# Altium PCB doanTK.PcbDoc
Units mm, origin at the board's own origin, x right, y up, seen from the top; angles counter-clockwise.
Board outline 160.53 x 89.54 mm, 2 copper layers (Top Layer, Bottom Layer); 50 components, 41 nets, 164 pads, 41 vias.
Unrouted connection lines stored in the file: 69.
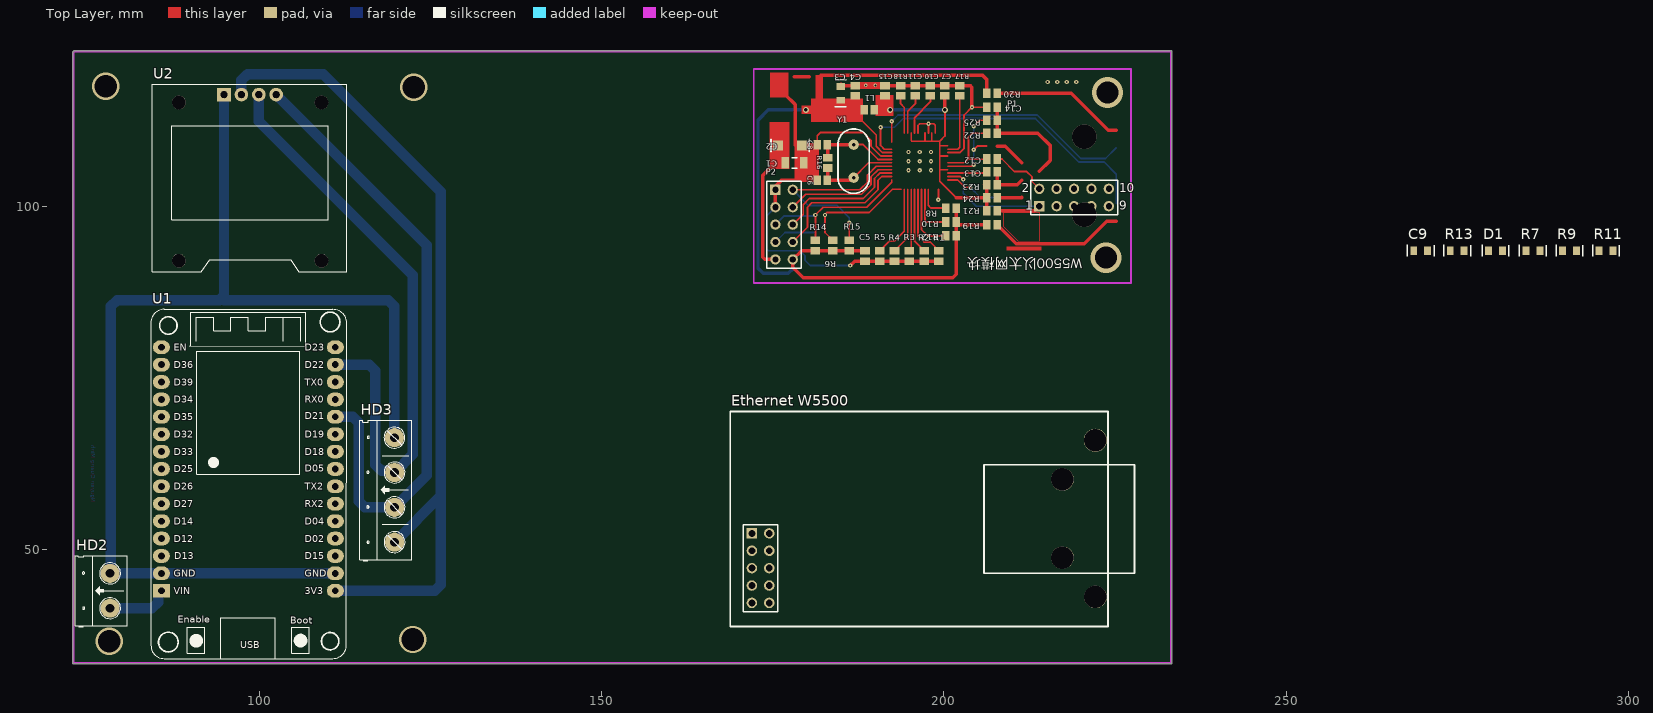
[diagram p0: Top Layer view]
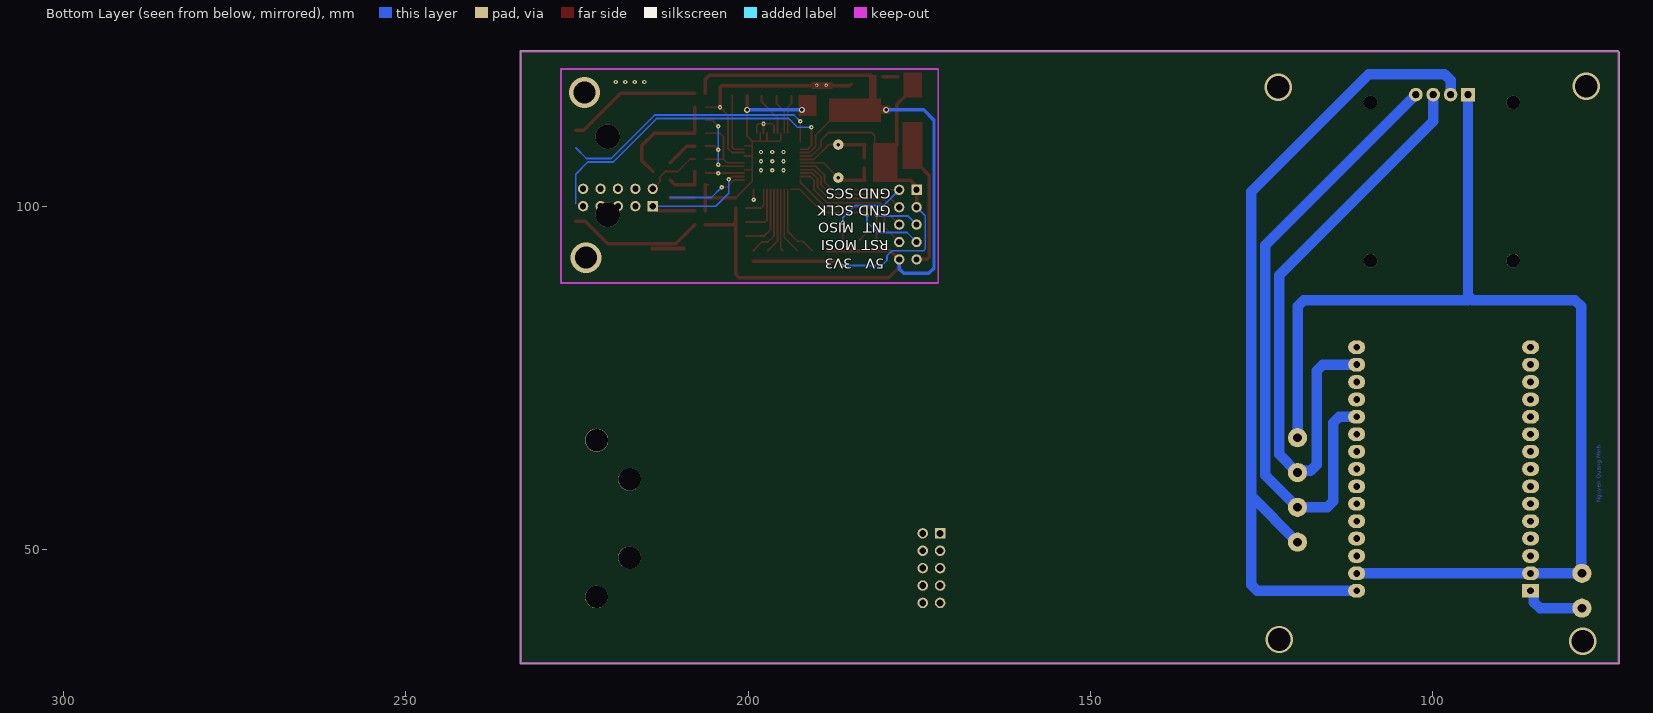
[diagram p1: Bottom Layer view, seen from below]

## Layer stack, top to bottom
Top Solder: solder mask 0.0102, Solder Resist, Dk 3.5
Top Layer: signal copper 0.0356
Dielectric 1: dielectric 0.32, FR-4, Dk 4.8
Bottom Layer: signal copper 0.0356
Bottom Solder: solder mask 0.0102, Solder Resist, Dk 3.5

## Board outline
72.771,33.401 72.771,34.036 72.771,122.555 cw(c72.898,122.555) 72.898,122.682 cw(c73.025,122.682) 73.025,122.809 233.172,122.809 cw(c233.172,122.682) 233.299,122.682 233.299,33.401 cw(c233.172,33.401) 233.172,33.274 72.898,33.274 cw(c72.898,33.401)

## Design rules (kind name [scope] priority, off if disabled: settings)
Clearance [All] p1: gap=0.508 ignorepadtopadclearanceinfootprint=FALSE
PolygonConnect [All] p1: connectstyle=Relief reliefconductorwidth=0.254 reliefentries=4 polygonreliefangle="90 Angle" airgapwidth=0.254
RoomDefinition doantk [InComponentClass('doantk')] p1: confinementstyle=ConfineIn formatcopy=TRUE lockcomponents=FALSE outline 244.983,26.797 258.699,26.797 258.699,41.021 244.983,41.021
RoutingLayers [All] p1: top layer_v5=FALSE bottom layer_v5=TRUE
RoutingVias [All] p1: holewidth=0.711 width=1.27 viastyle="Through Hole" minholewidth=0.711 minwidth=1.27 maxholewidth=0.711 maxwidth=1.27
SolderMaskExpansion [All] p1: expansion=0.102 istentingtop=FALSE
Width [All] p1: maxlimit=2.032 minlimit=0.762 preferedwidth=1.524
29 further rules are at their usual default settings.

## Components (designator, comment, footprint, x,y, rotation, side; value= is the part's Value field where it differs from the comment)
C1 "tanCap" C1206#1 178.181,106.426 r0 top value=10uF
C2 "tanCap" C1206#2 177.546,108.966 r0 top value=10uF
C3 "Cap" C0805#1 184.912,116.586 r90 top value=0.1uF
C4 "Cap" C0805#2 187.071,116.967 r90 top value=0.1uF
C5 "Cap" C0805#2 188.468,92.837 r270 top value=0.1uF
C6 "Cap" C0805#2 182.245,103.886 r0 top value=0.1uF
C7 "Cap" C0805#2 200.12,116.967 r90 top value=0.1uF
C8 "Cap" C0805#2 182.245,109.093 r0 top value=6.8nF
C9 "Cap" C0805#1 269.621,93.599 r0 top value=22nF
C10 "Cap" C0805#2 198.025,116.967 r90 top value=0.01uF
C11 "Cap" C0805#2 195.834,116.967 r90 top value=6.8nF
C12 "Cap" C0805#2 207.01,106.988 r180 top value=18pF
C13 "Cap" C0805#2 207.01,105.102 r0 top value=4.7uF
C14 "Cap" C0805#2 207.01,114.554 r0 top value=0.01uF
C15 "Cap" C0805#2 191.389,116.967 r270 top value=18pF
D1 "POWER" C0805#1 280.543,93.599 r0 top
"Ethernet W5500" "Ethernet W5500" "Ethernet W5500" 197.612,54.864 r0 top
HD2 "Pin" HED2 78.232,41.402 r90 top value="Header 2"
HD3 "Max30102" HED4 119.771,51.044 r90 top value="Header 4"
L1 "Inductor" C0805#2 189.103,114.173 r0 top value=1uH
P1 "排针引出" HDR2X5 213.921,100.101 r0 top
P2 "HR911105A" HDR2X5 175.387,102.489 r270 top
R1 "Res2" C0805#2 199.263,92.837 r270 top value=10K
R2 "Res2" C0805#2 197.104,92.837 r270 top value=10K
R3 "Res2" C0805#2 194.945,92.837 r270 top value=10K
R4 "Res2" C0805#2 192.786,92.837 r270 top value=10K
R5 "Res2" C0805#2 190.627,92.837 r270 top value=10K
R6 "Res2" C0805#2 183.769,94.361 r270 top value=10K
R7 "Res2" C0805#1 286.004,93.599 r0 top value=10K
R8 "Res2" C0805#2 201.041,99.822 r0 top value=10K
R9 "Res2" C0805#1 291.338,93.599 r0 top value=10K
R10 "Res2" C0805#2 201.041,97.79 r0 top value=10K
R11 "Res2" C0805#1 296.672,93.599 r0 top value=10K
R12 "Res2" C0805#2 201.041,95.758 r0 top value=10K
R13 "Res2" C0805#1 274.955,93.599 r0 top value=1K
R14 "Res2" C0805#2 181.229,94.361 r270 top value=10K
R15 "Res2" C0805#2 186.182,94.361 r270 top value=10K
R16 "Res2" C0805#2 183.007,106.426 r270 top value=51R
R17 "Res2" C0805#2 202.311,116.967 r270 top value=51R
R18 "Res2" C0805#2 193.675,116.967 r270 top value=10R
R19 "Res2" C0805#2 207.01,97.409 r0 top value="12.4K 1%"
R20 "Res2" C0805#2 207.01,116.586 r0 top value=82R
R21 "Res2" C0805#2 207.01,99.441 r180 top value=82R
R22 "Res2" C0805#2 207.01,110.762 r180 top value=1K
R23 "Res2" C0805#2 207.01,103.215 r180 top value=10K
R24 "Res2" C0805#2 207.01,101.328 r180 top value=1K
R25 "Res2" C0805#2 207.01,112.649 r0 top value=1M
U1 "ESP32_30" ESP32_30 98.425,61.722 r0 top
U2 "DISPLAY_OLED" DISPLAY_OLED 98.679,104.267 r0 top
Y1 "25MHz" XTAL-HC49 186.817,109.093 r270 top

## Footprints (in the part's own frame and the unit in brackets; to place one, negate y for a bottom-side part, rotate by r counter-clockwise, add the part's x,y. Pads: shape width x height; smd on the part's side, far side on the other; paste and mask are expansions set on the pad)
C0805#1 [mm] "Chip Resistor; Body 2.0 x 1.3 mm (LxW typ)"
  rect 1x1.27 smd: 1(-1.016,0) 2(1.016,0)
  silkscreen extent -1.96,-0.84 1.96,0.84, body extent -1,-0.62 1,0.63, height 0.78
C0805#2 [mm] "Chip Capacitor, Body 2.0x1.3mm, IPC High Density"
  rect 1.1x1.4 smd: 1(-0.75,0) 2(0.75,0)
  body extent -1.1,-0.72 1.1,0.72, height 1.4
C1206#1 [mm] "Chip Capacitor, Body 3.2x1.6mm, IPC High Density"
  rect 1.1x1.7 smd: 1(-1.35,0) 2(1.35,0)
  silkscreen extent -0.4,-0.75 0.4,0.75, body extent -1.7,-0.9 1.7,0.9, height 1.3
C1206#2 [mm]
  rect 1.524x1.524 smd: 1(-1.778,0) 2(1.778,0)
  silkscreen extent -2.79,-0.89 2.79,0.89, body extent -1.6,-0.89 1.6,0.89, height 1.02
DISPLAY_OLED [mm]
  rect 2x2 hole 1: 1(-3.81,12.128)
  round 2 hole 1: 2(-1.27,12.128) 3(1.27,12.128) 4(3.81,12.128)
  round 2 hole 2 unplated: ""(-10.414,-12.128) ""(-10.414,10.986) ""(10.414,-12.128) ""(10.414,10.986)
  silkscreen extent -14.3,-13.78 14.15,13.66, body extent -14.28,-13.76 14.12,13.64, height 5.7
ESP32_30 [mm] "Microcontoller Board 30 Pins Wifi 2.4GHz BLE 4.2 ESP32-WROOM-32D"
  oval 2.5x2 hole 1: 1(-12.7,17.78) 2(-12.7,15.24) 3(-12.7,12.7) 4(-12.7,10.16) 5(-12.7,7.62) 6(-12.7,5.08) 7(-12.7,2.54) 8(-12.7,0) 9(-12.7,-2.54) 10(-12.7,-5.08) 11(-12.7,-7.62) 12(-12.7,-10.16) 13(-12.7,-12.7) 14(-12.7,-15.24) 16(12.7,17.78) 17(12.7,15.24) 18(12.7,12.7) 19(12.7,10.16) 20(12.7,7.62) 21(12.7,5.08) 22(12.7,2.54) 23(12.7,0) 24(12.7,-2.54) 25(12.7,-5.08) 26(12.7,-7.62) 27(12.7,-10.16) 28(12.7,-12.7) 29(12.7,-15.24) 30(12.7,-17.78)
  rect 2.5x2 hole 1: 15(-12.7,-17.78)
  silkscreen extent -14.23,-27.69 14.35,23.31, body extent -14.15,-27.61 14.35,23.29, height 7
"Ethernet W5500" [mm]
  rect 1.53x1.53 hole 1: 1(-25.654,-2.54)
  round 1.53 hole 1: 2(-25.654,-5.08) 3(-25.654,-7.62) 4(-25.654,-10.16) 5(-25.654,-12.7) 6(-23.114,-12.7) 7(-23.114,-10.16) 8(-23.114,-7.62) 9(-23.114,-5.08) 10(-23.114,-2.54)
  round 3.4 hole 3.3: 3(24.511,11.049)
  round 3.3 hole 3.3: 4(19.685,-6.096) 4(19.685,5.334) 4(24.511,-11.811)
  silkscreen extent -28.83,-16.13 30.23,15.24, body extent -28.32,-14.33 30.58,13.57, height 15.56
HDR2X5 [mm] "Connector; Header; 5x2 Position"
  rect 1.5x1.5 hole 0.9: 1(0,0)
  round 1.5 hole 0.9: 2(0,2.54) 3(2.54,0) 4(2.54,2.54) 5(5.08,0) 6(5.08,2.54) 7(7.62,0) 8(7.62,2.54) 9(10.16,0) 10(10.16,2.54)
  silkscreen extent -1.27,-1.27 11.43,3.81
HED2 [mil] "Header 2, 2 pin, hight 300mil, Pin to Pin 200, Colour Green"
  round 110 hole 50: 1(0,0) 2(200,0)
  silkscreen extent -106,-100 300,200, body extent -92,-140 302,155, height 394
HED4 [mil] "Header 4, 4 pin, hight 300mil, Pin to Pin 200, Colour Green"
  round 110 hole 50: 1(0,0) 2(200,0) 3(400.06,0.06) 4(600.39,0.39)
  silkscreen extent -106,-100 700,200
XTAL-HC49 [mil]
  round 60 hole 19.68: 1(0,0) 2(190,0)
  silkscreen extent -90,-90 280,90

## Part data
C1 C2: library part "Cap Pol2", "Polarized Capacitor (Axial)", LatestRevisionDate=17-Jul-2002, LatestRevisionNote="Re-released for DXP Platform.", PackageDescription="Polarized Capacitor; 2 Leads", PackageReference=POLAR0.8, Published=8-Jun-2000, Publisher="Altium Limited"
C3 C4 C5 C6 C7 C8 C9 C10 C11 C12 C13 C14 C15: "Capacitor", LatestRevisionDate=17-Jul-2002, LatestRevisionNote="Re-released for DXP Platform.", PackageDescription="Radial Cap, Thru-Hole; 2 Leads; 0.3 in Pin Spacing", PackageReference=RAD-0.3, Published=8-Jun-2000, Publisher="Altium Limited"
D1: library part LED0, "Typical INFRARED GaAs LED", LatestRevisionDate=08-Jul-2005, LatestRevisionNote="Mech Layer 1 removed.", PackageDescription="LED; 2 Leads", PackageReference=LED-0, Published=8-Jun-2000, Publisher="Altium Limited"
HD2: library part Hed2, "Header 2 (Green)"
HD3: library part Hed4, "Header 4 (Green)"
P1: library part "Header 5X2", "Header, 5-Pin, Dual row", LatestRevisionDate=17-Jul-2002, LatestRevisionNote="Re-released for DXP Platform.", Publisher="Altium Limited"
P2: "RJ45插座"
R1 R2 R3 R4 R5 R6 R7 R8 R9 R10 R11 R12 R13 R14 R15 R16 R17 R18 R19 R20 R21 R22 R23 R24 R25: "Resistor", LatestRevisionDate=17-Jul-2002, LatestRevisionNote="Re-released for DXP Platform.", PackageDescription="Axial Device, Thru-Hole; 2 Leads; 0.4 in Pin Spacing", PackageReference=AXIAL-0.4, Published=8-Jun-2000, Publisher="Altium Limited"
U1: "Microcontoller Board 30 Pins Wifi 2.4GHz BLE 4.2 ESP32-WROOM-32D", ComponentLink1Description=Datasheet, ComponentLink1URL=https://www.mouser.com/datasheet/2/891/esp32_wroom_32d_esp32_wroom_32u_datasheet_en-1365844.pdf
U2: "Display Oled 128x64 0.96\" I2C."
Y1: library part XTAL, "Crystal Oscillator", LatestRevisionDate=17-Jul-2002, LatestRevisionNote="Re-released for DXP Platform.", PackageDescription="Crystal, Thru-Hole; 2 Leads; Body 3.1 x 8.2 mm (Dia.xH)", PackageReference=R38, Published=8-Jun-2000, Publisher="Altium Limited"
L1: Code_IEC=1005, Code_JEITA=0402, LatestRevisionDate=29-May-2009, LatestRevisionNote="IPC-7351 Footprint Added.", PackageDescription="Chip Inductor", PackageReference=0402-A, Published=8-Jun-2000, Publisher="Altium Limited"

## Via types
v1: diameter 0.635, hole 0.254, Top Layer to Bottom Layer, 28 vias
v2: diameter 4, hole 3.3, Top Layer to Bottom Layer, 4 vias
v3: diameter 0.889, hole 0.508, Top Layer to Bottom Layer, 3 vias
v4: diameter 4.5, hole 3.2, Top Layer to Bottom Layer, 2 vias
v5: diameter 3.581, hole 3.581, Top Layer to Bottom Layer, 2 vias
v6: diameter 0.508, hole 0.254, Top Layer to Bottom Layer, 2 vias

## Nets (pads, with @x,y where several pads share a name; then routed paths per layer and width w, separated by ;. In a path a pad name is that pad's centre, name@x,y a point inside that pad or via, vN(x,y) a via of type N, cw(c..) or ccw(c..) an arc to the next point about the centre after c; other vN are vias at no path point)
3V3: HD3.1 U1.30 U2.2 | length 121.4
  Bottom Layer w1.524: U2.2 97.409,118.487 98.302,119.38 109.347,119.38 126.517,102.21 126.517,57.79 ; U1.30 125.625,43.942 126.517,44.835 126.517,57.79 ; HD3.1 126.517,57.79
5V: HD2.1 U1.15 | length 9.4
  Bottom Layer w1.524: HD2.1 84.344,41.402 85.237,42.295 85.237,43.704 85.475,43.942 U1.15
/INT: P1.5 R14.1
/RESET: P1.7 R12.1 | length 9.9
  Top Layer w0.254: 196.719,102.58 196.719,96.651 197.612,95.758 R12.1
/SPI-SCS: P1.2 R15.1 U1.4
ACTLED: P2.10
GND: C1.2 C2.2 C3.2 C4.2 C5.2 C6.1 C7.2 C9.2 C10.1 C12.1 C13.2 C14.2 C15.1 D1.2 HD2.2 HD3.4 P1.1 P1.3 R1.1 R3.1 R5.1 R7.2 R8.2 R9.2 R10.2 R11.2 R19.1 R23.1 U1.14 U1.29 U2.1 | length 206.4
  Top Layer w0.254: R5.1 192.036,94.996 192.786,94.996 194.219,96.429 194.219,102.58 ; R3.1 195.219,93.861 195.219,102.58 ; 195.719,110.78 195.719,113.042 198.025,115.348 C10.1 C10.1@198.005,116.197 ; 196.219,102.58 196.219,95.754 197.104,94.869 197.981,94.869 R1.1
  Top Layer w0.508: C13.2 R23.1 207.796,103.251 210.721,103.251 211.381,103.911
  Bottom Layer w1.524: 94.524,86.705 94.869,86.36 118.868,86.36 119.761,85.467 HD3.4 ; U2.1 94.869,87.05 94.179,86.36 79.252,86.36 78.359,85.467 78.359,46.609 HD2.2 U1.14 U1.29
LINKLED: 
NetC13_1: C13.1 | length 5.8
  Top Layer w0.254: 200.569,104.93 206.088,104.93 C13.1
  other v1: 204.343,104.902
NetD1_1: D1.1 R13.1
NetP2_9: P2.9 R22.2
NetP2_12: R24.2
NetR7_1: R7.1
NetR8_1: R8.1 | length 5.1
  Top Layer w0.254: 197.719,102.58 197.719,100.223 198.12,99.822 R8.1
NetR9_1: R9.1
NetR10_1: R10.1 | length 7.7
  Top Layer w0.254: 197.219,102.58 197.219,98.056 197.485,97.79 R10.1
NetR11_1: R11.1
NetR19_2: R19.2 | length 19.9
  Top Layer w0.508: R19.2 210.554,94.615 220.472,94.615 223.783,97.926 225.171,97.926
NetR23_2: R23.2
PMODE0: R1.2 R2.1 | length 9.6
  Top Layer w0.254: 195.719,102.58 195.719,94.972 R2.1
PMODE1: R3.2 R4.1 | length 9.8
  Top Layer w0.254: R4.1 194.719,95.52 194.719,102.58
PMODE2: R5.2 R6.1
RCT: C10.2 P2.5 R20.1 R21.2
RXN: C11.2 R21.1
RXNNET: C11.1 P2.6 | length 25
  Top Layer w0.254: P2.6 179.451,98.933 179.451,100.33 180.34,101.219 188.214,101.219 189.865,102.87 189.865,104.14 190.655,104.93 192.369,104.93 ; 194.719,110.78 194.719,113.947 195.834,115.062 C11.1
RXP: C8.2 R20.2 | length 19.7
  Top Layer w0.508: R20.2 218.567,116.586 223.977,111.176 225.171,111.176
RXPNET: C8.1 P2.3
SCL: HD3.3 U1.17 U2.3 | length 88.8
  Bottom Layer w1.524: U2.3 99.949,112.522 122.428,90.043 122.428,63.864 HD3.3 119.526,61.449 117.868,61.449 116.967,62.349 116.967,76.069 116.074,76.962 U1.17
SDA: HD3.2 U1.20 U2.4 | length 92.1
  Bottom Layer w1.524: U2.4 124.46,94.424 124.46,60.813 HD3.2 115.447,56.124 114.554,57.017 114.554,68.449 113.661,69.342 U1.20
SPI-MISO: P1.6
SPI-MOSI: P1.8
SPI-SCLK: P1.4
TCT: C9.1 P2.4 R18.2 | length 23
  Top Layer w0.254: P2.4 179.832,101.854 187.96,101.854 189.357,103.251 189.357,104.394 190.393,105.43 192.369,105.43 ; R18.2 193.675,115.062 194.219,114.518 194.219,110.78
TXN: P2.2 R17.2 | length 9.4
  Top Layer w0.254: 200.569,108.43 202.029,108.43 202.311,108.712 R17.2
TXP: P2.1 R16.2
VCC-1V2: C14.1
VCC-3V3A: C6.2 C7.1 L1.2 R16.1 R17.1 R18.1
VCC-3V3D: C2.1 C4.1 C5.1 L1.1 P1.10 R2.2 R4.2 R6.2 R12.2 R13.2 R14.2 R15.2 R22.1 R24.1 | length 3.6
  Top Layer w0.508: R24.1 211.337,101.328 211.381,101.371
VCC-5V: C1.1 C3.1 P1.9
XI: C15.2 R25.1 Y1.1 | length 13.9
  Top Layer w0.254: 200.569,105.93 204.101,105.93 v1(204.343,106.172) ; v1(204.343,108.331) 204.887,108.875 206.26,108.875 ; v1(204.343,111.76) 205.232,112.649 R25.1
  Bottom Layer w0.254: v1(204.343,106.172) v1(204.343,108.331) v1(204.343,111.76)
XO: C12.2 R25.2 Y1.2
pads on no net: "Ethernet W5500.1" "Ethernet W5500.2" "Ethernet W5500.3" "Ethernet W5500.4" "Ethernet W5500.5" "Ethernet W5500.6" "Ethernet W5500.7" "Ethernet W5500.8" "Ethernet W5500.9" "Ethernet W5500.10" P2.7 P2.8 U1.1 U1.2 U1.3 U1.5 U1.6 U1.7 U1.8 U1.9 U1.10 U1.11 U1.12 U1.13 U1.16 U1.18 U1.19 U1.21 U1.22 U1.23 U1.24 U1.25 U1.26 U1.27 U1.28 U2.
copper on no net: | length 577.9
  Top Layer w0.254: 177.927,94.869 180.086,97.028 180.086,99.949 180.721,100.584 188.468,100.584 190.373,102.489 190.373,103.886 190.917,104.43 192.369,104.43 ; 177.927,102.489 187.706,102.489 188.849,103.632 188.849,104.648 190.131,105.93 192.369,105.93 ; 181.229,95.111 v1(181.229,98.806) 182.372,99.949 188.722,99.949 192.369,103.596 192.369,103.93 ; 181.495,109.093 181.495,110.375 181.991,110.871 188.214,110.871 189.357,109.728 189.357,108.839 190.766,107.43 192.369,107.43 ; 183.769,95.111 182.626,96.254 v1(182.626,98.806) 182.499,98.806 182.88,99.187 189.103,99.187 192.496,102.58 193.719,102.58 ; 186.182,95.111 v1(186.182,97.663) ; 186.817,104.267 188.98,106.43 192.369,106.43 ; 186.817,109.093 188.214,109.093 190.377,106.93 192.369,106.93 ; 187.452,113.157 190.119,110.49 190.119,108.839 191.028,107.93 192.369,107.93 ; v1(190.754,111.633) 190.754,108.966 191.29,108.43 192.369,108.43 ; 192.369,109.43 v1(192.369,112.486) ; 195.219,110.78 195.219,109.708 195.326,109.601 197.231,109.601 ; 196.219,110.78 196.219,111.891 196.469,112.141 v1(197.739,112.141) ; 197.219,110.78 197.219,109.613 197.231,109.601 ; 197.719,110.78 197.739,110.8 v1(197.739,112.141) ; 198.219,110.78 198.219,109.7 198.12,109.601 ; 198.719,110.78 198.719,111.923 198.501,112.141 v1(197.739,112.141) ; v1(199.189,101.039) 199.219,101.068 199.219,102.58 ; 199.497,105.43 200.569,105.43 ; v3(200.152,114.173) 200.152,110.363 199.39,109.601 ; 200.569,103.93 202.013,103.93 203.073,102.87 v1(203.835,102.87) ; 200.569,104.43 202.402,104.43 v1(202.819,104.013) ; 200.569,106.43 203.069,106.43 203.581,106.942 ; 200.569,107.43 199.402,107.43 199.39,107.442 ; 200.569,107.93 202.291,107.93 202.946,108.585 202.946,113.411 v1(204.089,114.554) 206.26,114.554 ; 200.569,108.93 199.481,108.93 199.39,108.839 ; 201.821,101.328 199.39,103.759 199.39,105.537 199.39,107.442 ; 205.776,103.215 206.26,103.215 ; 206.26,106.988 206.213,106.942 203.581,106.942 ; 206.26,110.762 204.107,110.762 203.581,110.236 203.581,106.942 ; 207.76,106.988 208.48,106.988 210.312,105.156 212.09,105.156 212.852,104.394 212.852,103.71 213.921,102.641 ; 197.231,109.601 198.12,109.601 ; 198.12,109.601 199.39,109.601 ; 199.39,107.442 199.39,108.839 ; 199.39,108.839 199.39,109.601
  Top Layer w0.508: 174.879,105.918 173.546,104.584 173.546,92.647 173.863,92.329 175.387,92.329 ; 175.387,99.949 175.387,102.489 175.387,102.997 176.276,103.886 179.07,103.886 ; 175.993,116.473 176.77,116.473 178.296,114.947 178.296,108.966 ; 178.169,118.999 180.352,118.999 ; 181.852,118.999 182.106,119.253 205.613,119.253 206.26,118.606 206.26,116.586 ; 183.007,105.676 183.007,103.898 182.995,103.886 186.436,103.886 186.817,104.267 ; 183.007,107.176 183.007,109.081 182.995,109.093 186.817,109.093 ; 184.912,117.936 185.131,117.717 187.071,117.717 191.389,117.717 193.675,117.717 202.311,117.717 203.847,117.717 204.089,117.475 v1(204.089,114.554) ; v1(186.309,91.44) 186.956,92.087 188.468,92.087 190.627,92.087 192.786,92.087 194.945,92.087 197.104,92.087 199.263,92.087 ; 188.468,93.587 188.444,93.611 186.182,93.611 183.769,93.611 181.229,93.611 179.209,93.611 177.927,92.329 177.927,91.186 179.451,89.662 201.295,89.662 201.791,90.158 201.791,95.758 201.791,97.79 ; 200.12,116.217 200.12,114.205 v3(200.152,114.173) ; 201.791,99.822 201.791,97.79 ; 201.821,101.328 206.26,101.328 ; 206.26,97.409 202.172,97.409 201.791,97.79 ; 206.26,99.441 206.26,101.328 ; 206.26,103.215 206.26,101.328 ; 207.76,99.441 209.296,99.441 213.261,99.441 213.921,100.101 ; 207.76,108.875 208.957,108.875 211.381,106.451 ; 207.76,114.554 207.76,112.649 207.76,110.762 213.723,110.762 215.519,108.966 215.519,106.779 213.921,105.181
  Bottom Layer w0.254: 175.387,94.869 176.784,96.266 181.102,96.266 182.626,97.79 v1(182.626,98.806) ; 175.387,97.409 176.657,98.679 181.102,98.679 v1(181.229,98.806) ; 175.387,99.949 174.117,98.679 174.117,93.853 174.371,93.599 178.943,93.599 179.705,92.837 179.705,92.202 180.467,91.44 v1(186.309,91.44) ; 177.927,102.489 180.213,100.203 184.404,100.203 186.182,98.425 v1(186.182,97.663) ; v1(190.754,111.633) 192.786,111.633 194.056,112.903 213.36,112.903 219.71,106.553 223.393,106.553 225.171,104.775 225.171,100.457 ; v1(192.369,112.486) 193.294,113.411 213.614,113.411 219.964,107.061 223.6,107.061 225.171,108.632 ; v1(202.819,104.013) 202.819,101.981 204.699,100.101 213.921,100.101 ; v1(203.835,102.87) 205.334,101.371 211.381,101.371
  Bottom Layer w0.508: 177.927,92.329 177.927,90.932 177.292,90.297 173.609,90.297 172.847,91.059 172.847,112.649 174.371,114.173 v3(179.832,114.173) ; v3(192.151,114.173) v3(200.152,114.173)
  other v1: 194.818,105.346 196.469,105.346 198.12,105.346 194.818,106.68 196.469,106.68 198.12,106.68 194.818,108.013 196.469,108.013 198.12,108.013 215.138,118.237 216.535,118.237 217.932,118.237 219.329,118.237
  other v2: 78.105,36.576 122.428,36.83 122.555,117.475 77.597,117.602
  other v4: 223.647,92.583 223.901,116.713
  other v5: 220.525,98.831 220.525,110.261
  other v6: 188.595,117.729 189.992,117.729

## Polygon pours and split planes (outlines as drawn)
no net on Top Layer "Top Layer-GND" (solid, pour order 3): 213.995,95.029 213.995,99.162 208.686,99.162 208.661,99.187 208.661,97.155 210.82,94.996

## Keep-outs
Keep-Out Layer:
  lines w0.254: 72.898,122.555 72.898,34.036 72.898,33.401 233.172,33.401 233.172,122.682 73.025,122.682 ; 172.212,88.9 172.212,120.142 227.33,120.142 227.33,88.9 213.55,88.9 185.992,88.9 172.212,88.9

## Other copper
Top Layer:
  region: 177.419,112.395 174.498,112.395 174.498,105.537 177.419,105.537
  region: 180.594,114.808 179.197,114.808 179.197,113.538 180.594,113.538
  region: 188.214,115.824 180.594,115.824 180.594,112.395 188.214,112.395
  region: 192.659,116.332 189.992,116.332 189.992,113.284 192.659,113.284
  region: 177.292,119.634 174.625,119.634 174.625,115.951 177.292,115.951
  region: 182.372,119.253 181.229,119.253 181.229,115.57 182.372,115.57
  region: 214.249,94.201 209.169,94.201 209.169,93.599 214.249,93.599
  region: 190.754,118.237 187.706,118.237 187.706,117.221 190.754,117.221
  region: 181.737,109.347 178.181,109.347 178.181,103.632 181.737,103.632
Bottom Layer:
  text "Nguyen Quang Minh" at 75.245,56.896 h1 r270

## Silkscreen, mask and mechanical layers (free items; w line width, h text height)
Top Overlay:
  text "W5500以太网模块" at 220.218,92.964 h2.54 r180
Bottom Overlay:
  text "GND SCS" at 179.197,103.124 h2.54 r180
  text "GND SCLK" at 179.197,100.711 h2.54 r180
  text "INT  MISO" at 179.832,98.171 h2.54 r180
  text "RST MOSI" at 179.451,95.631 h2.54 r180
  text "5V   3V3" at 180.086,92.964 h2.54 r180

## Text inside footprints (layer, text, board x,y; h text height)
P1: Top Overlay "10" at 225.605,102.133 h1.27; Top Overlay "9" at 225.605,99.593 h1.27; Top Overlay "1" at 211.889,99.593 h1.27; Top Overlay "2" at 211.381,102.133 h1.27
U1: Top Overlay "RX0" at 106.68,71.374 h1; Top Overlay "TX0" at 106.68,73.914 h1; Top Overlay "D22" at 106.68,76.454 h1; Top Overlay "D21" at 106.68,68.961 h1; Top Overlay "D18" at 106.68,63.754 h1; Top Overlay "D05" at 106.68,61.341 h1; Top Overlay "D19" at 106.68,66.294 h1; Top Overlay "D25" at 87.503,61.214 h1; Top Overlay "D33" at 87.503,63.754 h1; Top Overlay "D35" at 87.503,68.834 h1; Top Overlay "D34" at 87.503,71.374 h1; Top Overlay "D32" at 87.503,66.294 h1; Top Overlay "D26" at 87.503,58.674 h1; Top Overlay "D13" at 87.63,48.514 h1; Top Overlay "D27" at 87.503,56.134 h1; Top Overlay "D14" at 87.503,53.594 h1; Top Overlay "GND" at 87.503,45.974 h1; Top Overlay "VIN" at 87.503,43.434 h1; Top Overlay "D12" at 87.503,51.054 h1; Top Overlay "D39" at 87.503,73.914 h1; Top Overlay "3V3" at 106.68,43.434 h1; Top Overlay "D04" at 106.68,53.594 h1; Top Overlay "GND" at 106.68,45.974 h1; Top Overlay "D02" at 106.68,51.054 h1; Top Overlay "D15" at 106.68,48.514 h1; Top Overlay "RX2" at 106.68,56.134 h1; Top Overlay "TX2" at 106.68,58.674 h1; Top Overlay "D36" at 87.503,76.454 h1; Top Overlay "D23" at 106.68,78.994 h1; Top Overlay "EN" at 87.503,78.994 h1; Top Overlay "USB" at 97.225,35.512 h1; Top Overlay "Boot" at 104.521,39.116 h1; Top Overlay "Enable" at 88.138,39.243 h1